# Altium PCB 202014A2232.PcbDoc
Units mil, origin at the board's own origin, x right, y up, seen from the top; angles counter-clockwise.
Board outline 2085 x 1810 mil, 2 copper layers (Top Layer, Bottom Layer); 59 components, 59 nets, 231 pads, 246 vias.
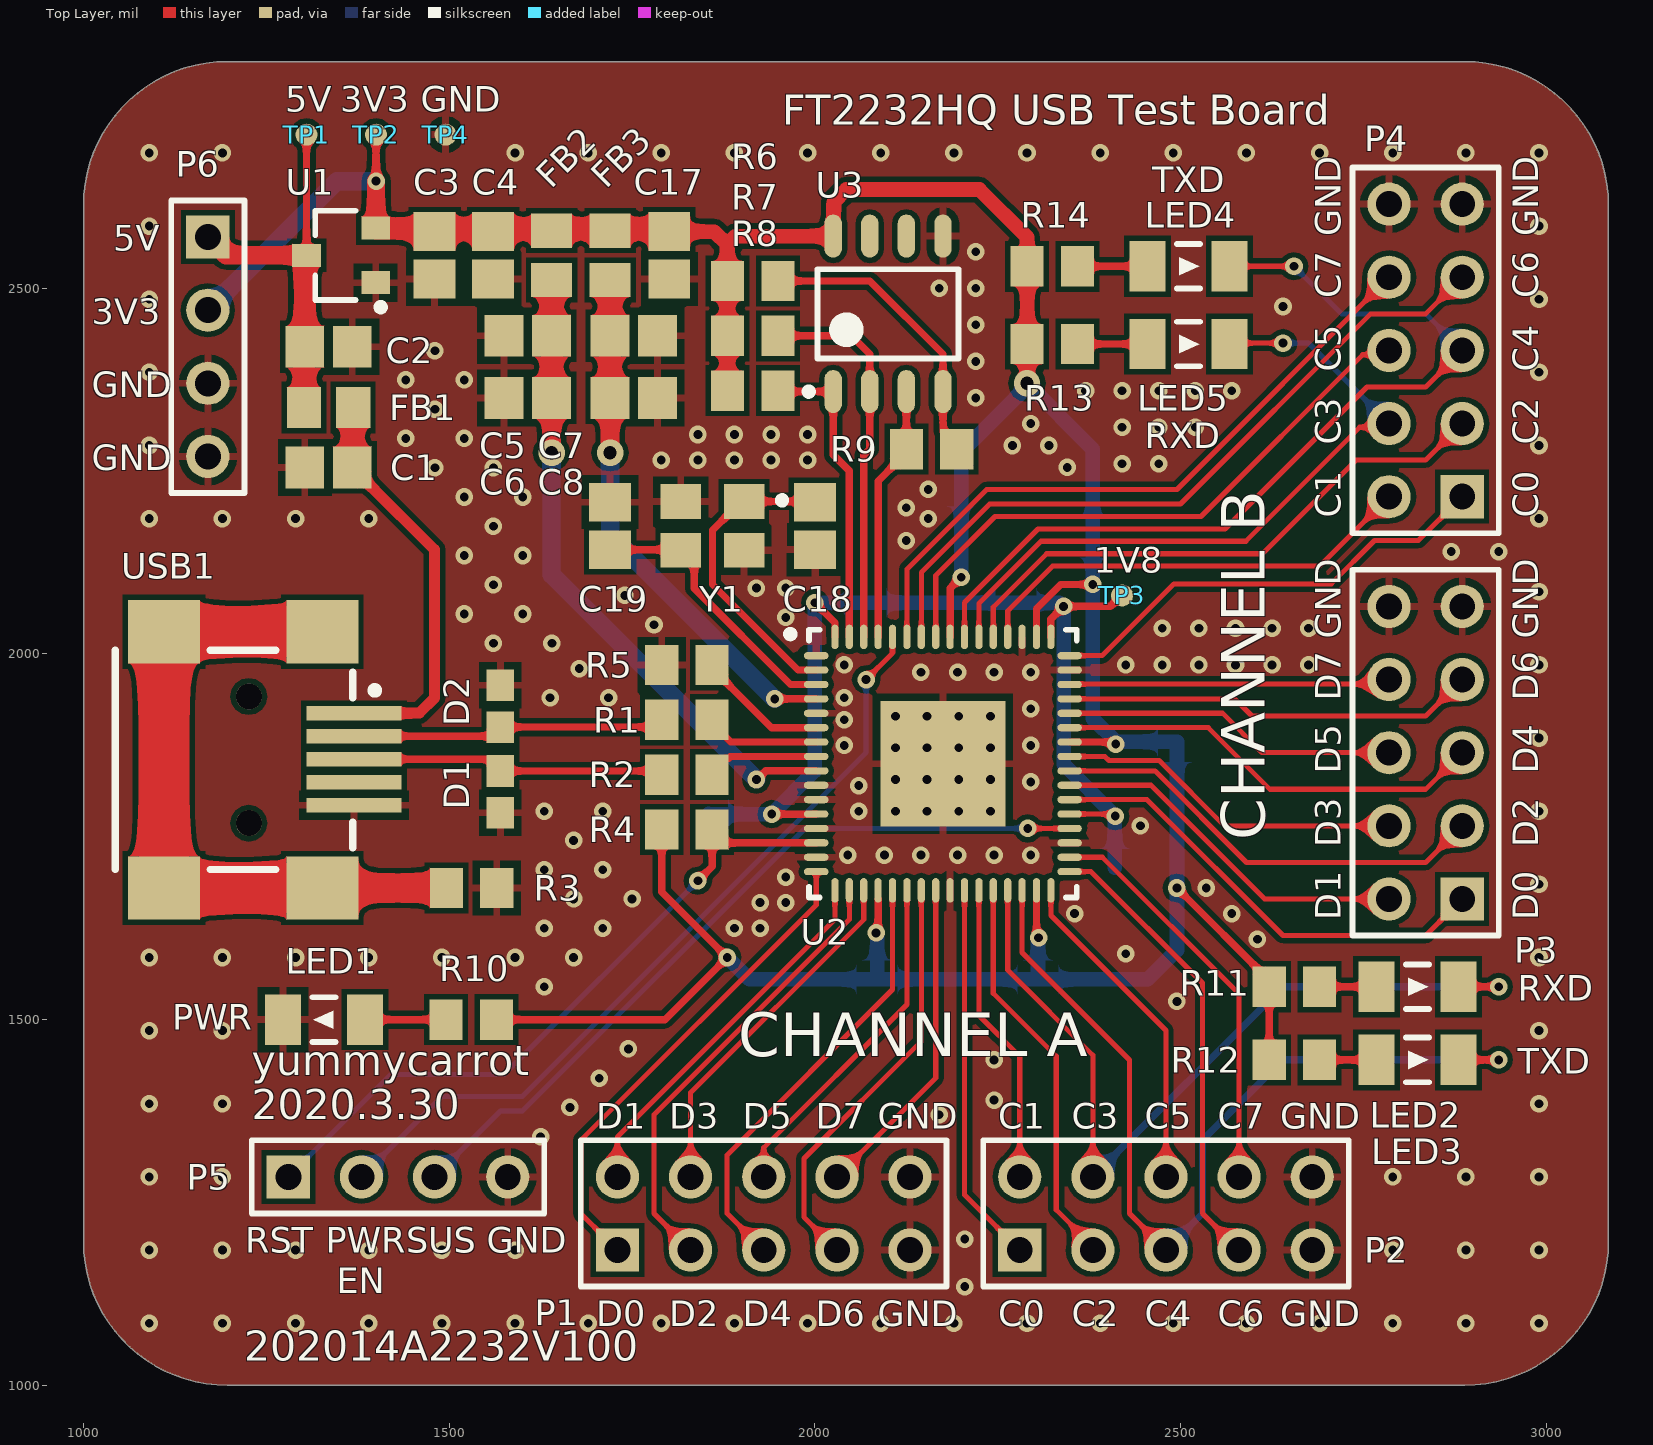
[diagram p0: Top Layer view]
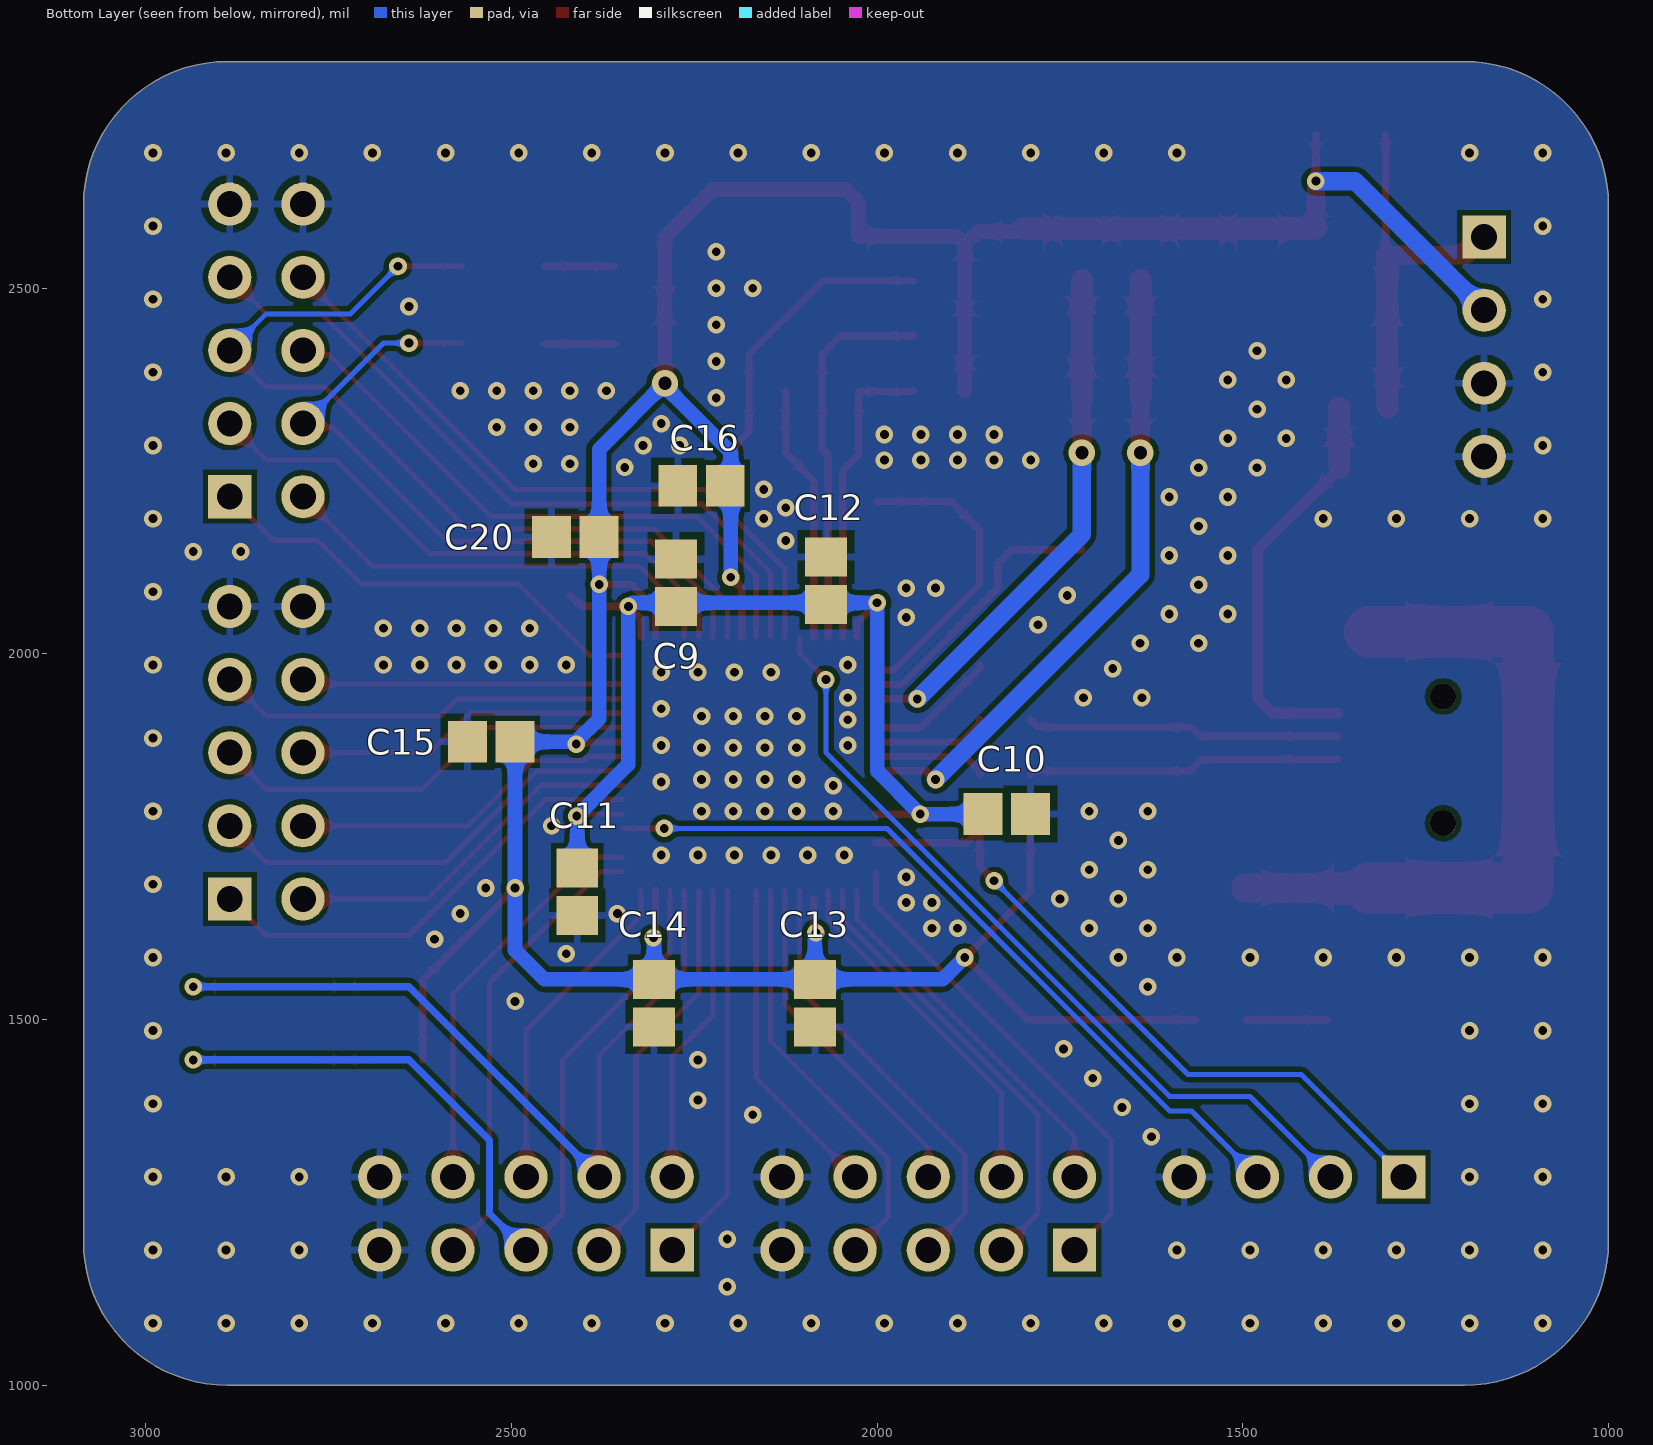
[diagram p1: Bottom Layer view, seen from below]
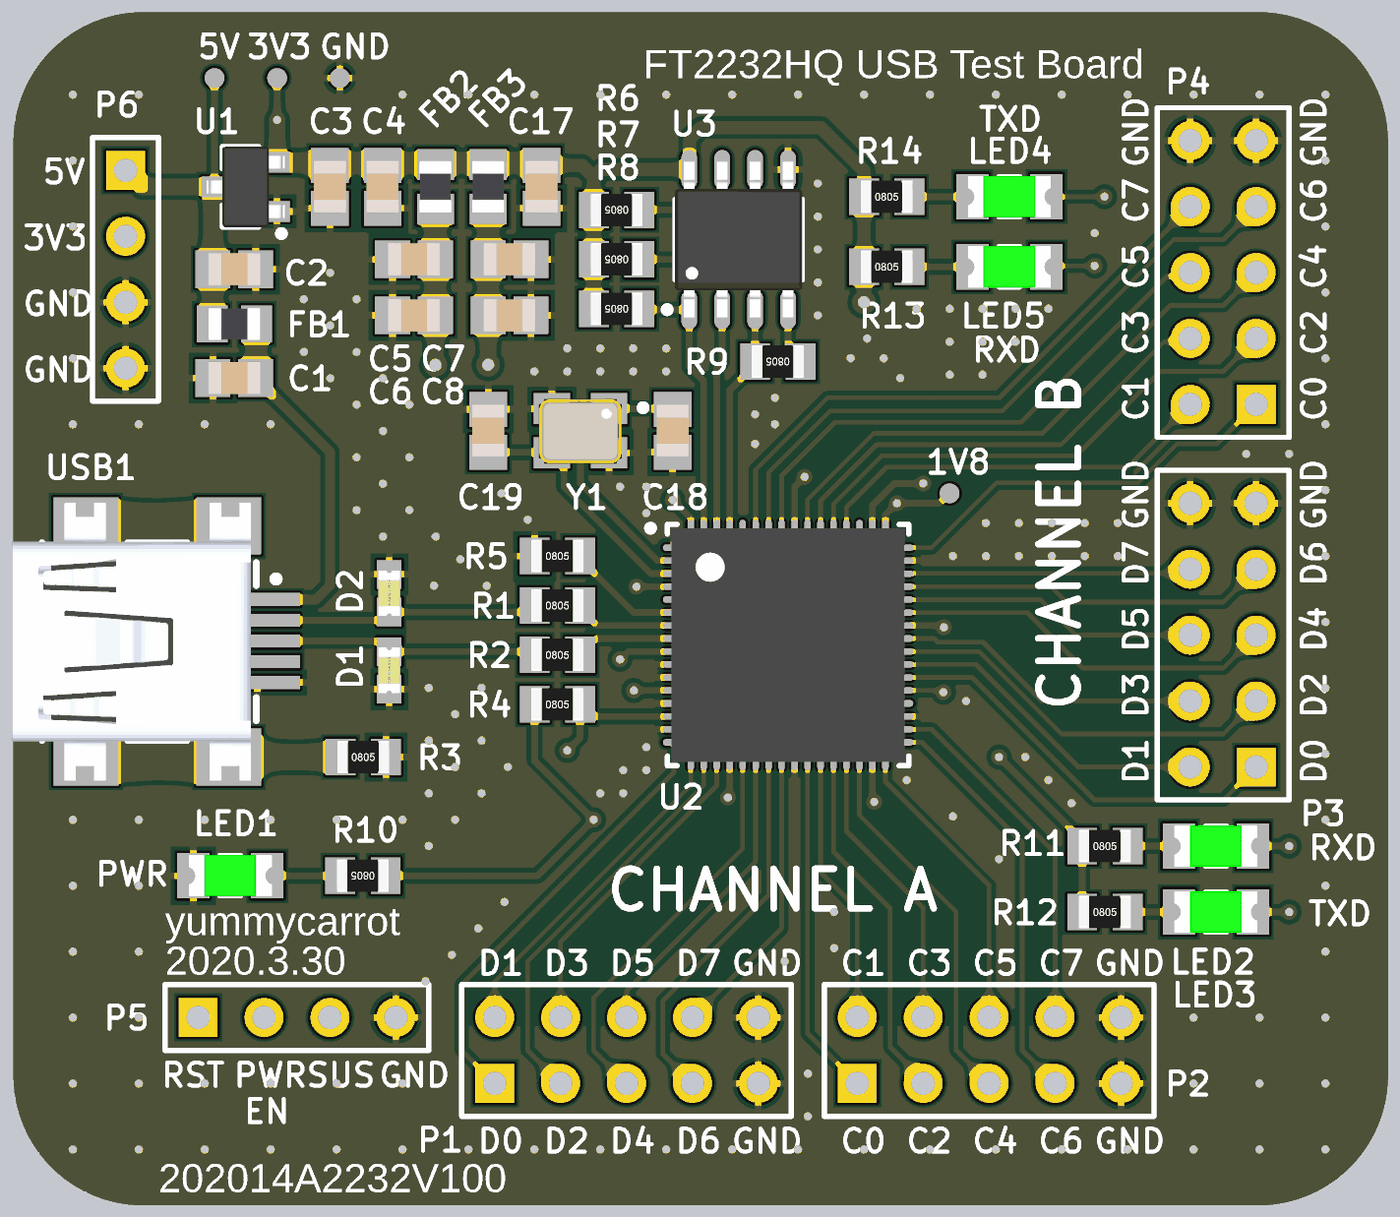
[diagram p2: 3D render of the assembled board from above, using the file's embedded part models]
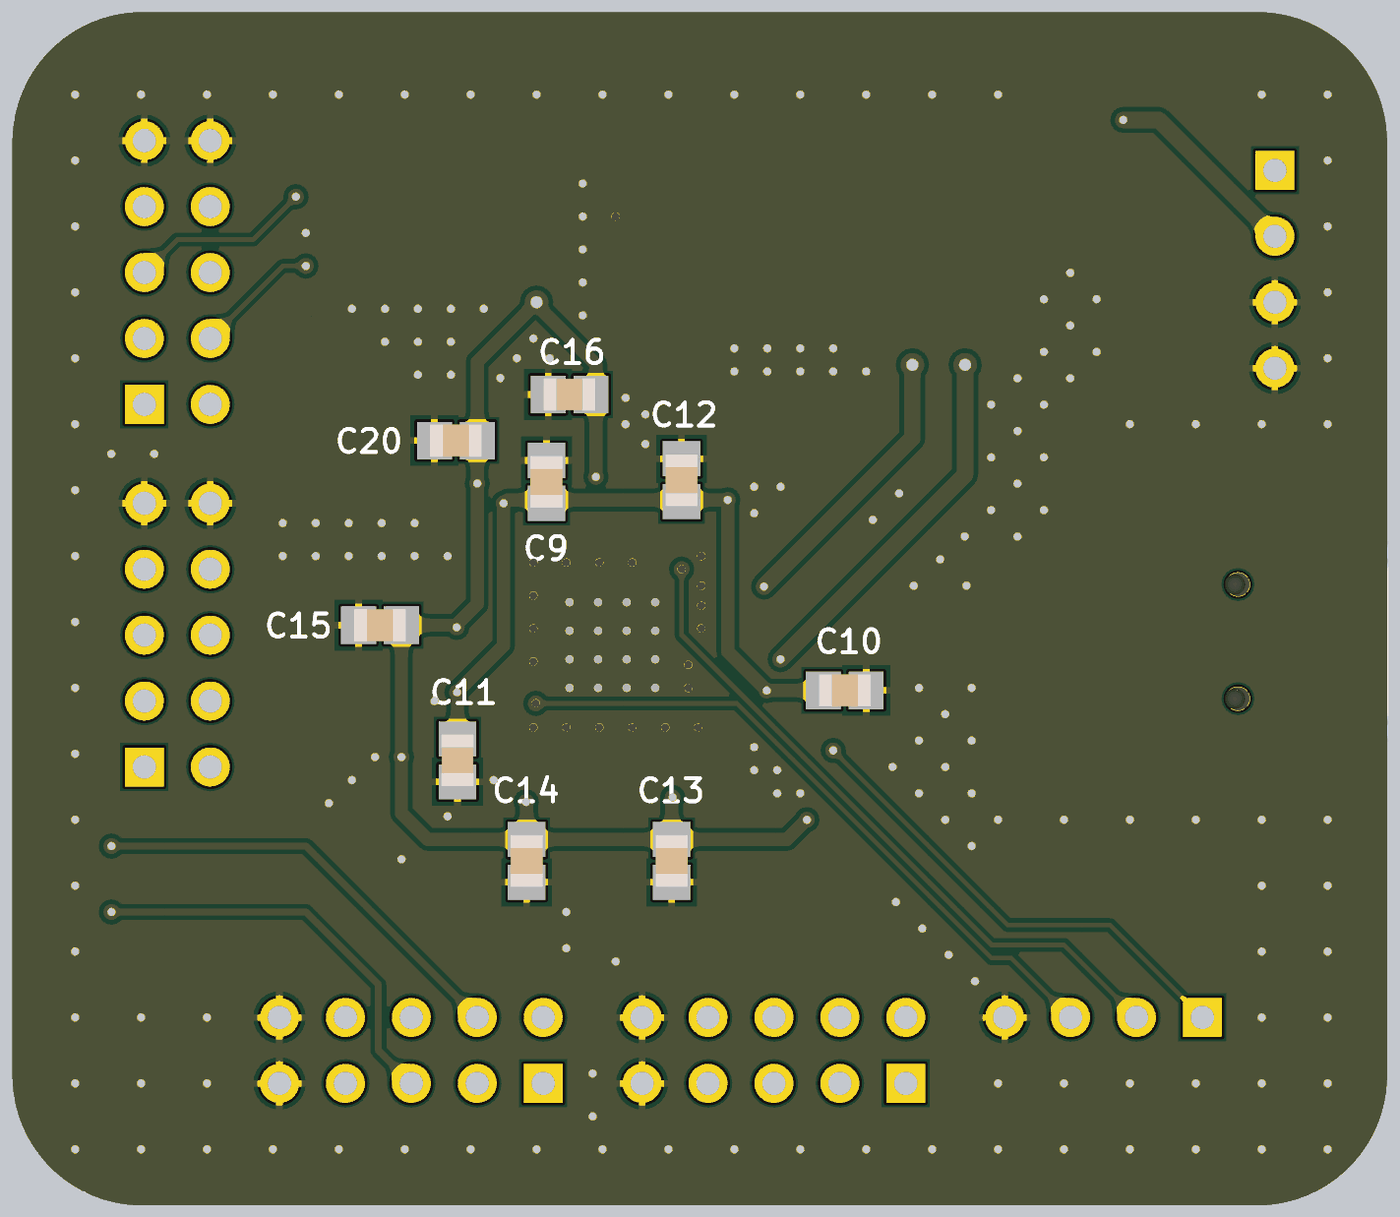
[diagram p3: 3D render of the assembled board from below, using the file's embedded part models]

## Layer stack, top to bottom
Top Solder: solder mask 0.4, Solder Resist, Dk 3.5
Top Layer: signal copper 1.4
Dielectric 1: dielectric 12.6, FR-4, Dk 4.8
Bottom Layer: signal copper 1.4
Bottom Solder: solder mask 0.4, Solder Resist, Dk 3.5

## Board outline
1000,1196.85 ccw(c1196.85,1196.85) 1196.85,1000 2888.15,1000 ccw(c2888.15,1196.85) 3085,1196.85 3085,2613.15 ccw(c2888.15,2613.15) 2888.15,2810 1196.85,2810 ccw(c1196.85,2613.15) 1000,2613.15

## Design rules (kind name [scope] priority, off if disabled: settings)
Clearance [All] p1: gap=7 ignorepadtopadclearanceinfootprint=FALSE
PolygonConnect [All] p1: thpad.connectstyle=Relief thpad.reliefconductorwidth=10 thpad.reliefentries=4 thpad.polygonreliefangle="90 Angle" thpad.airgapwidth=10 smdpad.connectstyle=Relief smdpad.reliefconductorwidth=10 smdpad.reliefentries=4 smdpad.polygonreliefangle="90 Angle" smdpad.airgapwidth=10 via.connectstyle=Direct via.reliefconductorwidth=10 via.reliefentries=4 via.polygonreliefangle="90 Angle" via.airgapwidth=10
RoutingVias [All] p1: holewidth=12 width=24 viastyle="Through Hole" minholewidth=12 minwidth=24 maxholewidth=28 maxwidth=50
SolderMaskExpansion [All] p1: expansion=4 istentingtop=FALSE
Width [All] p1: maxlimit=100 minlimit=7 preferedwidth=10
30 further rules are at their usual default settings.

## Components (designator, comment, footprint, x,y, rotation, side; value= is the part's Value field where it differs from the comment)
C1 "Cap" C0805 1335,2255 r180 top value=10nf
C2 "Cap" C0805 1335,2420 r180 top value=4.7uf
C3 "Cap" C0805 1480,2545 r90 top value=4.7uf
C4 "Cap" C0805 1560,2545 r90 top value=0.1uf
C5 "Cap" C0805 1607.52,2435 r0 top value=4.7uf
C6 "Cap" C0805 1607.52,2350 r0 top value=0.1uf
C7 "Cap" C0805 1752.48,2435 r180 top value=4.7uf
C8 "Cap" C0805 1752.48,2350 r180 top value=0.1uf
C9 "Cap" C0805 2275,2097.48 r270 bottom value=4.7uf
C10 "Cap" C0805 1822.52,1781.1 r180 bottom value=0.1uf
C11 "Cap" C0805 2410,1675 r270 bottom value=0.1uf
C12 "Cap" C0805 2070,2100 r90 bottom value=0.1uf
C13 "Cap" C0805 2085,1522.52 r270 bottom value=0.1uf
C14 "Cap" C0805 2305,1522.52 r270 bottom value=0.1uf
C15 "Cap" C0805 2527.48,1880 r0 bottom value=0.1uf
C16 "Cap" C0805 2240,2230 r0 bottom value=0.1uf
C17 "Cap" C0805 1801,2545 r90 top value=0.1uf
C18 "Cap" C0805 2000,2175 r90 top value=27pf
C19 "Cap" C0805 1720,2175 r270 top value=27pf
C20 "Cap" C0805 2412.48,2160 r0 bottom value=0.1uf
D1 "PGB1010603" PGB1010603-0603 1570,1811.46 r90 top
D2 "PGB1010603" PGB1010603-0603 1570,1928.54 r270 top
FB1 "Ferrite Bead" FB0805 1335,2336.91 r180 top value="600R 1.5A"
FB2 "Ferrite Bead" FB0805 1640,2545 r270 top value="600R 1.5A"
FB3 "Ferrite Bead" FB0805 1720,2545 r270 top value="600R 1.5A"
LED1 "LED" LED1206 1329.96,1405 r180 top
LED2 "LED" LED1206 2822.83,1640 r0 top
LED3 "LED" LED1206 2822.83,1540 r0 top
LED4 "LED" LED1206 2509.65,2518.7 r0 top
LED5 "LED" LED1206 2509.65,2625 r0 top
P1 "Header 5X2" HDR2X5 1730,1185 r0 top
P2 "Header 5X2" HDR2X5 2280,1185 r0 top
P3 "Header 5X2" HDR2X5 2885,1665 r90 top
P4 "Header 5X2" HDR2X5 2885,2215 r90 top
P5 "Header 4" HDR1X4 1280,1285 r0 top
P6 "Header 4" HDR1X4 1170,2570 r270 top
R1 "Res" R0805 1825,1910 r0 top value=10R
R2 "Res" R0805 1825,1835 r0 top value=10R
R3 "Res" R0805 1530.55,1680 r0 top value=0R
R4 "Res" R0805 1825,1760 r0 top value=1K
R5 "Res" R0805 1825,1985 r0 top value=12K
R6 "Res" R0805 1915,2510 r180 top value=10K
R7 "Res" R0805 1915,2435 r180 top value=10K
R8 "Res" R0805 1915,2360 r180 top value=10K
R9 "Res" R0805 2159.45,2280 r180 top value=2K
R10 "Res" R0805 1530,1500 r180 top value=1K
R11 "Res" R0805 2655.55,1545 r0 top value=NC/1K
R12 "Res" R0805 2655.55,1445 r0 top value=NC/1K
R13 "Res" R0805 2324.61,2423.7 r0 top value=NC/1K
R14 "Res" R0805 2324.61,2530 r0 top value=NC/1K
TP1 "TestPoint" TestPoint-R30 1305,2710 r0 top
TP2 "TestPoint" TestPoint-R30 1400,2710 r90 top
TP3 "TestPoint" TestPoint-R30 2420,2080 r90 top
TP4 "TestPoint" TestPoint-R30 1495,2710 r90 top
U1 "XC6206" XC6206-SOT23 1352.24,2545 r180 top
U2 "FT2232HQ" FT2232HQ-QFN64 2175,1850 r0 top
U3 "93LC46" 93LC46-SOIC8 2100,2465 r90 top
USB1 "USB" USB-Mini-SMT 1218.27,1855.2 r90 top
Y1 "XTAL" XTAL-3225 1860,2175 r180 top value=12.000M

## Footprints (in the part's own frame and the unit in brackets; to place one, negate y for a bottom-side part, rotate by r counter-clockwise, add the part's x,y. Pads: shape width x height; smd on the part's side, far side on the other; paste and mask are expansions set on the pad)
93LC46-SOIC8 [mm] "SOIC, 8-Leads, Body 4.90x3.90mm, Pitch 1.27mm, IPC Medium Density"
  oval 1.5x0.6 smd: 1(-2.7,1.905) 2(-2.7,0.635) 3(-2.7,-0.635) 4(-2.7,-1.905) 5(2.7,-1.905) 6(2.7,-0.635) 7(2.7,0.635) 8(2.7,1.905)
  silkscreen extent -2.82,-2.45 1.55,2.88, body extent -3,-2.45 3,2.45, height 1.75
C0805 [mm] "Chip Capacitor, 2-Leads, Body 2.01x1.25mm, IPC Medium Density"
  rect 1.35x1.45 smd: 1(-0.825,0) 2(0.825,0)
  body extent -1,-0.62 1,0.63, height 0.58
FB0805 [mm] "Chip Inductor, 2-Leads, Body 2.00x1.20mm, IPC Medium Density"
  rect 1.19x1.42 smd: 1(-0.855,0) 2(0.855,0)
  body extent -1,-0.62 1,0.63, height 0.85
FT2232HQ-QFN64 [mm] "QFN, 64-Leads, Body 9.00x9.00mm, Pitch 0.50mm, Thermal Pad 4.35x4.35mm, IPC Medium Density"
  oval 0.85x0.25 smd: 1(-4.4,3.75) 2(-4.4,3.25) 3(-4.4,2.75) 4(-4.4,2.25) 5(-4.4,1.75) 6(-4.4,1.25) 7(-4.4,0.75) 8(-4.4,0.25) 9(-4.4,-0.25) 10(-4.4,-0.75) 11(-4.4,-1.25) 12(-4.4,-1.75) 13(-4.4,-2.25) 14(-4.4,-2.75) 15(-4.4,-3.25) 16(-4.4,-3.75) 33(4.4,-3.75) 34(4.4,-3.25) 35(4.4,-2.75) 36(4.4,-2.25) 37(4.4,-1.75) 38(4.4,-1.25) 39(4.4,-0.75) 40(4.4,-0.25) 41(4.4,0.25) 42(4.4,0.75) 43(4.4,1.25) 44(4.4,1.75) 45(4.4,2.25) 46(4.4,2.75) 47(4.4,3.25) 48(4.4,3.75)
  oval 0.25x0.85 smd: 17(-3.75,-4.4) 18(-3.25,-4.4) 19(-2.75,-4.4) 20(-2.25,-4.4) 21(-1.75,-4.4) 22(-1.25,-4.4) 23(-0.75,-4.4) 24(-0.25,-4.4) 25(0.25,-4.4) 26(0.75,-4.4) 27(1.25,-4.4) 28(1.75,-4.4) 29(2.25,-4.4) 30(2.75,-4.4) 31(3.25,-4.4) 32(3.75,-4.4) 49(3.75,4.4) 50(3.25,4.4) 51(2.75,4.4) 52(2.25,4.4) 53(1.75,4.4) 54(1.25,4.4) 55(0.75,4.4) 56(0.25,4.4) 57(-0.25,4.4) 58(-0.75,4.4) 59(-1.25,4.4) 60(-1.75,4.4) 61(-2.25,4.4) 62(-2.75,4.4) 63(-3.25,4.4) 64(-3.75,4.4)
  rect 4.35x4.35 smd: 65(0,0)
  silkscreen extent -5.42,-4.65 4.65,4.65, body extent -4.5,-4.5 4.5,4.5, height 0.9
HDR1X4 [mm] "Connector; Header; 4 Position"
  rect 1.5x1.5 hole 0.9: 1(0,0)
  round 1.5 hole 0.9: 2(2.54,0) 3(5.08,0) 4(7.62,0)
  silkscreen extent -1.27,-1.27 8.89,1.27
HDR2X5 [mm] "Connector; Header; 5x2 Position"
  rect 1.5x1.5 hole 0.9: 1(0,0)
  round 1.5 hole 0.9: 2(0,2.54) 3(2.54,0) 4(2.54,2.54) 5(5.08,0) 6(5.08,2.54) 7(7.62,0) 8(7.62,2.54) 9(10.16,0) 10(10.16,2.54)
  silkscreen extent -1.27,-1.27 11.43,3.81
LED1206 [mm] "Chip LED, 2-Leads, Body 3.20x1.60mm, IPC Medium Density"
  rect 1.25x1.75 smd: 1(-1.398,-2.413) 2(1.452,-2.413)
  silkscreen extent -0.37,-3.19 0.43,-1.64, body extent -1.57,-3.21 1.63,-1.61, height 1.1
PGB1010603-0603 [mm] "Chip Diode, 2-Leads, Body 1.66x0.84mm, IPC Medium Density"
  rect 1.1x0.95 smd: 1(-0.725,0) 2(0.725,0)
  body extent -0.88,-0.42 0.88,0.42, height 0.35
R0805 [mm] "Chip Resistor, 2-Leads, Body 2.00x1.25mm, IPC Medium Density"
  rect 1.15x1.4 smd: 1(-0.875,0) 2(0.875,0)
  body extent -1,-0.62 1,0.63, height 0.59
TestPoint-R30 [mil]
  round 30 smd: 1(0,0)
USB-Mini-SMT [mm]
  round 0.9 hole 0.9: 0(-2.2,-0.2) 0(2.2,-0.2)
  rect 0.5x3.3 smd: 1(1.623,-3.85) 2(0.823,-3.85) 3(0.023,-3.85) 4(-0.777,-3.85) 5(-1.577,-3.85)
  rect 2.2x2.5 smd: 6(4.45,-2.75) 7(-4.45,-2.75) 8(-4.45,2.75) 9(4.45,2.75)
  silkscreen extent -3.81,-4.7 3.81,4.44, body extent -5.35,-3.61 5.35,5.59, height 3.95
XC6206-SOT23 [mm] "SOT23, 3-Leads, Body 2.90x2.80mm, Pitch 0.95mm, IPC Medium Density"
  rect 1x0.8 smd: 1(-1.2,0.95) 2(-1.2,-0.95) 3(1.2,0)
  silkscreen extent -1.5,-1.55 0.9,1.92, body extent -1.5,-1.55 1.5,1.55, height 1.3
XTAL-3225 [mm] "4脚3225贴片晶振"
  rect 1.4x1.2 smd: 1(-1.1,-0.85) 2(1.1,-0.85) 3(1.1,0.85) 4(-1.1,0.85)
  silkscreen extent -2.54,-1.01 -2.29,-0.76, body extent -1.6,-1.23 1.6,1.27, height 0.61

## Part data
D1 D2: "Surface Mount Polymeric Electrostatic Discharge Suppressors"
P1 P2 P3 P4: "Header, 5-Pin, Dual row", LatestRevisionDate=17-Jul-2002, LatestRevisionNote="Re-released for DXP Platform.", Publisher="Altium Limited"
P5 P6: "Header, 4-Pin", LatestRevisionDate=17-Jul-2002, LatestRevisionNote="Re-released for DXP Platform.", Publisher="Altium Limited"
R1 R2 R3 R4 R5 R6 R7 R8 R9 R10 R11 R12 R13 R14: "电阻"
TP1 TP2 TP3 TP4: "测试点"
U1: "Low ESR Cap. Compatible Positive Voltage Regulators"
U2: "Dual High Speed USB to Multipurpose UART/FIFO IC"
U3: "1K Microwire Compatible Serial EEPROM"
USB1: library part USB-SHIELD
Y1: library part XTAL3, "无源晶振"

## Via types
v1: diameter 24, hole 12, Top Layer to Bottom Layer, tented both sides, 243 vias
v2: diameter 36, hole 18, Top Layer to Bottom Layer, tented both sides, 3 vias

## Nets (pads, with @x,y where several pads share a name; then routed paths per layer and width w, separated by ;. In a path a pad name is that pad's centre, name@x,y a point inside that pad or via, vN(x,y) a via of type N, cw(c..) or ccw(c..) an arc to the next point about the centre after c; other vN are vias at no path point)
+3V3: C3.2 C4.2 C13.1 C14.1 C15.1 C16.1 C17.2 C20.1 FB2.1 FB3.1 P6.2 R4.1 R6.2 R7.2 R8.2 R10.1 R11.1 R12.1 R13.1 R14.1 TP2.1 U1.2 U2.20 U2.31 U2.42 U2.50 U2.56 U3.8 | length 5037
  Top Layer w10: U1.2 U1.2@1400,2582.91 ; v1(1400,2646.46) TP2.1 ; R10.1 1795,1500 v1(1880,1585) 1790.55,1674.45 R4.1 ; v1(2083.6,1618.66) 2083.6,1622.45 2086.42,1625.26 U2.20@2086.42,1665.04 ; U2.56 2184.92,2023.31 2184.92,2089.92 v1(2200,2105) ; U2.31 2302.95,1618.57 2305.77,1615.76 v1(2305.77,1611.97) ; U2.50 2302.95,2061.89 2336.06,2095 v1(2380,2095) ; U2.42 2348.31,1879.61 2408.28,1879.61 v1(2411.17,1876.71) ; v1(2495,1680) 2621.1,1553.9 R11.1 R12.1
  Top Layer w20: C17.2 1862.52,2577.48 1880,2560 ; R8.2 1880,2360.55 1880,2560 ; v2(2290,2370) 2290.16,2370.16 R13.1 R14.1 2290.16,2569.84 2225,2635 2042.91,2635 2025.69,2617.78 2025.69,2571.99 U3.8 1891.3,2571.3 1880,2560
  Top Layer w25: U1.2@1400,2582.91 v1(1400,2646.46)
  Top Layer w30: U1.2 1400.24,2581.65 C17.2@1801,2581.65
  Bottom Layer w20: v1(1880,1585) 1910,1555 C13.1 ; v1(2083.6,1618.66) 2083.6,1617.58 2085,1616.18 C13.1 ; v1(2200,2105) 2200,2275.67 2290,2365.67 v2(2290,2370) 2380,2280 C20.1 v1(2380,2095) 2380,1911.72 v1@2411.17,1880.55 ; v1(2305.77,1611.97) 2305.77,1610.89 2305,1610.12 C14.1 ; v1(2411.17,1876.71) 2412.25,1876.71 2415.54,1880 C15.1 v1(2495,1680) 2495,1595 2455,1555 C14.1 ; C13.1 C14.1
  Bottom Layer w25: P6.2 1346.46,2646.46 v1(1400,2646.46)
+5V: C2.2 FB1.2 P6.1 TP1.1 U1.3 | length 519.2
  Top Layer w10: U1.3 TP1.1
  Top Layer w25: P6.1 1195,2545 1303.27,2545 U1.3
  Top Layer w30: FB1.2 1301.93,2337.5 1301.93,2419.41 C2.2 1302.52,2544.25 U1.3@1303.27,2545
AC0: P2.1 U2.26 | length 523
  Top Layer w7: U2.26 2204.53,1260.47 P2.1
AC1: P2.2 U2.27 | length 414.9
  Top Layer w7: U2.27 2224.21,1505.79 2280,1450 P2.2
AC2: P2.3 U2.28 | length 548.1
  Top Layer w7: U2.28 2243.9,1536.1 2330,1450 2330,1240 2380,1190 P2.3
AC3: LED2.2 P2.4 U2.29 | length 1157.7
  Top Layer w7: U2.29 2263.58,1567.87 2380,1451.46 P2.4
  Top Layer w10: LED2.2 v1(2935,1545)
  Bottom Layer w10: P2.4 2640,1545 v1(2935,1545)
AC4: LED3.2 P2.5 U2.30 | length 1249.5
  Top Layer w7: U2.30 2283.27,1591.73 2430,1445 2430,1235 P2.5
  Top Layer w10: LED3.2 v1(2935,1445)
  Bottom Layer w10: P2.5 2530,1235 2530,1335 2640,1445 v1(2935,1445)
AC5: P2.6 U2.32 | length 457
  Top Layer w7: U2.32 2322.64,1642.36 2480,1485 P2.6
AC6: P2.7 U2.33 | length 630.6
  Top Layer w7: U2.33 2377.64,1702.36 2530,1550 2530,1235 P2.7
AC7: P2.8 U2.34 | length 559.2
  Top Layer w7: U2.34 2392.95,1722.05 2580,1535 P2.8
AD0: P1.1 U2.16 | length 671.4
  Top Layer w7: P1.1 1680,1235 1680,1335 2001.77,1656.77 U2.16
AD1: P1.2 U2.17 | length 514.9
  Top Layer w7: P1.2 1730,1339.8 2027.36,1637.16 U2.17
AD2: P1.3 U2.18 | length 623.1
  Top Layer w7: P1.3 1780,1235 1780,1370 2047.05,1637.05 U2.18
AD3: P1.4 U2.19 | length 489.8
  Top Layer w7: P1.4 1830,1400 2066.73,1636.73 U2.19
AD4: P1.5 U2.21 | length 606.1
  Top Layer w7: P1.5 1880,1235 1880,1315 2106.1,1541.1 U2.21
AD5: P1.6 U2.22 | length 472.9
  Top Layer w7: P1.6 1930,1325 2125.79,1520.79 U2.22
AD6: P1.7 U2.23 | length 576.9
  Top Layer w7: P1.7 1985,1230 1985,1310 2145.47,1470.47 U2.23
AD7: P1.8 U2.24 | length 447.8
  Top Layer w7: P1.8 2165.16,1420.16 U2.24
BC0: P4.1 U2.48 | length 626.8
  Top Layer w7: U2.48 2392.64,1997.64 2490.88,2095.88 2705.88,2095.88 2765,2155 2825,2155 P4.1
BC1: P4.2 U2.52 | length 621.6
  Top Layer w7: U2.52 2263.58,2058.58 2325,2120 2690,2120 P4.2
BC2: P4.3 U2.53 | length 785.8
  Top Layer w7: U2.53 2243.9,2063.9 2317,2137 2612,2137 2740,2265 2835,2265 P4.3
BC3: LED4.2 P4.4 U2.54 | length 972.9
  Top Layer w7: U2.54 2224.21,2069.21 2309,2154 2589,2154 2744.97,2309.97 2779.97,2309.97 P4.4 ; LED4.2 2568.11,2425 v1(2640,2425)
  Bottom Layer w7: v1(2640,2425) 2675,2425 P4.4
BC4: LED5.2 P4.5 U2.55 | length 1236.3
  Top Layer w7: U2.55 2204.53,2070.51 2305.02,2171 2560.8,2171 2754.8,2365 2835,2365 P4.5 ; LED5.2 v1(2655,2530)
  Bottom Layer w7: v1(2655,2530) 2720,2465 2835,2465 P4.5
BC5: P4.6 U2.57 | length 831.2
  Top Layer w7: U2.57 2165.16,2107.07 2246.08,2188 2528,2188 2749.07,2409.07 2779.07,2409.07 P4.6
BC6: P4.7 U2.58 | length 994.9
  Top Layer w7: U2.58 2145.47,2111.43 2239.04,2205 2500,2205 2760,2465 2835,2465 P4.7
BC7: P4.8 U2.59 | length 917.1
  Top Layer w7: U2.59 2125.79,2115.79 2235,2225 2495,2225 P4.8
BD0: P3.1 U2.38 | length 634.4
  Top Layer w7: U2.38 2454.21,1800.79 2640,1615 2835,1615 P3.1
BD1: P3.2 U2.39 | length 501.2
  Top Layer w7: U2.39 2459.53,1820.47 2615,1665 P3.2
BD2: P3.3 U2.40 | length 609.3
  Top Layer w7: U2.40 2464.84,1840.16 2590,1715 2835,1715 P3.3
BD3: P3.4 U2.41 | length 476.1
  Top Layer w7: U2.41 2396.22,1859.84 2401.91,1854.16 2470.64,1854.16 2559.8,1765 P3.4
BD4: P3.5 U2.43 | length 592.4
  Top Layer w7: U2.43 2537.8,1899.21 2622.01,1815 2835,1815 P3.5
BD5: P3.6 U2.44 | length 459.1
  Top Layer w7: U2.44 2557.48,1918.9 2611.38,1865 P3.6
BD6: P3.7 U2.45 | length 567.3
  Top Layer w7: U2.45 2573.89,1938.58 2597.47,1915 2835,1915 P3.7
BD7: P3.8 U2.46 | length 439.6
  Top Layer w7: U2.46 2348.77,1958.81 2778.81,1958.81 P3.8
GND: C1.2 C2.1 C3.1 C4.1 C5.1 C6.1 C7.1 C8.1 C9.1 C10.2 C11.2 C12.2 C13.2 C14.2 C15.2 C16.2 C17.1 C18.1 C19.1 C20.2 D1.1 D2.1 LED1.2 P1.9 P1.10 P2.9 P2.10 P3.9 P3.10 P4.9 P4.10 P5.4 P6.3 P6.4 R3.2 R5.1 TP4.1 U1.1 U2.1 U2.5 U2.10 U2.11 U2.13 U2.15 U2.25 U2.35 U2.47 U2.51 U2.65 U3.5 USB1.5 Y1.2 Y1.4
  other v1: 1090,1085 1190,1085 1290,1085 1390,1085 1490,1085 1590,1085 1690,1085 1790,1085 1890,1085 1990,1085 2090,1085 2190,1085 2290,1085 2390,1085 2490,1085 2590,1085 2690,1085 2790,1085 2890,1085 2990,1085 2205,1135 1090,1185 1190,1185 1290,1185 1390,1185 1490,1185 1590,1185 2790,1185 2890,1185 2990,1185 2205,1200 1090,1285 1190,1285 2790,1285 2890,1285 2990,1285 1625,1340 2170,1370 1665,1380 1090,1385 1190,1385 2990,1385 2245,1390 1705,1420 2245,1445 1745,1460 1090,1485 1190,1485 2990,1485 2495,1525 1630,1545 1090,1585 1190,1585 1290,1585 1390,1585 1490,1585 1590,1585 1670,1585 2990,1585 2425,1590 2605,1610 1630,1625 1710,1625 1890,1625 1925,1625 2355,1645 2570,1645 1925,1660 1960,1660 1670,1665 1750,1665 2535,1680 2990,1685 1960,1695 1630,1705 1710,1705 2045,1725 2095,1725 2145,1725 2195,1725 2245,1725 2295,1725 1670,1745 2445,1765 1630,1785 1710,1785 2060,1785 2110.04,1785.04 2153.35,1785.04 2196.65,1785.04 2239.96,1785.04 2990,1785 2060,1820 2295,1825 2110.04,1828.35 2153.35,1828.35 2196.65,1828.35 2239.96,1828.35 2110.04,1871.65 2153.35,1871.65 2196.65,1871.65 2239.96,1871.65 2040,1875 2295,1875 2990,1885 2040,1910 2110.04,1914.96 2153.35,1914.96 2196.65,1914.96 2239.96,1914.96 2295,1925 1637.91,1940 1717.91,1940 2040,1940 2145,1975 2195,1975 2245,1975 2295,1975 1677.91,1980 2040,1985 2425,1985 2475,1985 2525,1985 2575,1985 2625,1985 2675,1985 2990,1985 1560.48,2014.6 1640.48,2014.6 2475,2035 2525,2035 2575,2035 2625,2035 2675,2035 1780,2040 1960,2050 1520.48,2054.6 1600.48,2054.6 1740,2080 2990,2085 1920,2090 1960,2090 1560.48,2094.6 1520.48,2134.6 1600.48,2134.6 2870,2140 2935,2140 2125,2155 1560.48,2174.6 1090,2185 1190,2185 1290,2185 1390,2185 2155,2185 2990,2185 2125,2200 1520.48,2214.6 1600.48,2214.6 2155,2225 1480.48,2254.6 1560.48,2254.6 2345,2255 2420,2260 2470,2260 1790,2265 1840,2265 1890,2265 1940,2265 1990,2265 1090,2285 2270,2285 2320,2285 2990,2285 1440.48,2294.6 1520.48,2294.6 1840,2300 1890,2300 1940,2300 1990,2300 2420,2310 2470,2310 2520,2310 2295,2315 1480.48,2334.6 2220,2350 2370,2360 2420,2360 2470,2360 2520,2360 2570,2360 1440.48,2374.6 1520.48,2374.6 1090,2385 2990,2385 2220,2400 1480.48,2414.6 2220,2450 2640,2475 1090,2485 2990,2485 2170,2500 2220,2500 2220,2550 1090,2585 2990,2585 1090,2685 1190,2685 1590,2685 1690,2685 1790,2685 1890,2685 1990,2685 2090,2685 2190,2685 2290,2685 2390,2685 2490,2685 2590,2685 2690,2685 2790,2685 2890,2685 2990,2685
NetC1_1: C1.1 FB1.1 USB1.1 | length 564
  Top Layer w15: C1.1 1367.48,2253.03 1386.56,2233.96 1388.52,2233.96 1480,2142.48 1480,1940 1459.09,1919.09 USB1.1
  Top Layer w30: C1.1 1368.07,2255.59 1368.07,2336.32 FB1.1
NetC5_2: C5.2 C6.2 FB2.2 U2.9 | length 885.6
  Top Layer w10: v1(1920,1828.35) 1921.05,1828.35 1932.86,1840.16 U2.9
  Top Layer w25: v2(1640,2275) C6.2
  Top Layer w30: C6.2 C5.2 FB2.2
  Bottom Layer w25: v2(1640,2275) 1640,2108.35 v1(1920,1828.35)
NetC7_2: C7.2 C8.2 FB3.2 U2.4 | length 722.7
  Top Layer w10: v1(1945,1938.58) U2.4
  Top Layer w25: v2(1720,2275) C8.2
  Top Layer w30: C8.2 C7.2 FB3.2
  Bottom Layer w25: v2(1720,2275) 1720,2163.58 v1(1945,1938.58)
NetC18_2: C18.2 U2.2 Y1.1 | length 421.1
  Top Layer w10: C18.2 1999.02,2208.46 Y1.1 1899.37,2208.46 1860,2169.09 1860,2095 1976.97,1978.03 2001.69,1978.03 U2.2
NetC19_2: C19.2 U2.3 Y1.3 | length 377.6
  Top Layer w10: C19.2 1815.73,2142.5 1835,2123.23 1835,2090 1966.65,1958.35 2001.69,1958.35 U2.3
NetD1_2: D1.2 R2.1 USB1.3 | length 430.9
  Top Layer w10: USB1.3 1556.3,1856.1 1570,1842.4 D1.2 1785.55,1840 R2.1
NetD2_2: D2.2 R1.1 USB1.2 | length 430
  Top Layer w10: USB1.2 1557.6,1887.6 D2.2 1780.55,1900 R1.1
NetLED1_1: LED1.1 R10.2 | length 110.6
  Top Layer w10: LED1.1 R10.2
NetLED2_1: LED2.1 R11.2 | length 77.8
  Top Layer w10: R11.2 LED2.1
NetLED3_1: LED3.1 R12.2 | length 77.8
  Top Layer w10: R12.2 LED3.1
NetLED4_1: LED4.1 R13.2 | length 95.6
  Top Layer w10: R13.2 LED4.1
NetLED5_1: LED5.1 R14.2 | length 95.6
  Top Layer w10: R14.2 LED5.1
NetR1_2: R1.2 U2.7 | length 157.8
  Top Layer w10: R1.2 1859.45,1905.08 1877.09,1887.44 1885,1879.53 U2.7
NetR2_2: R2.2 U2.8 | length 155.5
  Top Layer w10: R2.2 1859.45,1839.92 1877.09,1857.56 1882.01,1857.56 1884.29,1859.84 U2.8
NetR3_1: R3.1 USB1.6 USB1.7 USB1.8 USB1.9 | length 953
  Top Layer w40: USB1.7 R3.1
  Top Layer w70: USB1.7 USB1.8 USB1.9 USB1.6
NetR5_2: R5.2 U2.6 | length 180.7
  Top Layer w10: R5.2 1859.45,1980.08 1877.09,1962.44 1877.56,1962.44 1940.71,1899.29 2001.69,1899.29 U2.6
NetR6_1: R6.1 R9.1 U3.4 | length 404.8
  Top Layer w10: R6.1 2075,2510 2175,2410 2175,2303.82 2193.9,2284.92 R9.1
NetR7_1: R7.1 U2.62 U3.2 | length 526.1
  Top Layer w10: R7.1 2050,2435 2075,2410 U3.2 2075,2280 2066.73,2271.73 U2.62
NetR8_1: R8.1 U2.63 U3.1 | length 420.7
  Top Layer w10: R8.1 1950.75,2358.7 U3.1 2025,2272.35 2046.97,2250.38 2046.97,2023.31 U2.63
NetR9_2: R9.2 U2.61 U3.3 | length 351.5
  Top Layer w10: U2.61 2086.42,2236.5 2125,2275.08 R9.2 U3.3
nPWREN: P5.2 U2.60 | length 1103.4
  Top Layer w7: v1(2070,1965) 2106.1,2001.1 U2.60
  Bottom Layer w7: P5.2 1490,1395 1600,1395 2070,1865 v1(2070,1965)
nRST: P5.1 R4.2 U2.14 | length 955.4
  Top Layer w10: v1(1840,1690) 1859.45,1709.45 R4.2@1859.45,1759.37 ; R4.2 R4.2@1859.45,1759.37 ; U2.14 1877.09,1741.73 R4.2@1859.45,1759.37
  Bottom Layer w7: P5.1 1420,1425 1575,1425 v1(1840,1690)
nSUSPEND: P5.3 U2.36 | length 1065.6
  Top Layer w7: v1(2291.12,1761.42) U2.36
  Bottom Layer w7: P5.3 1570,1375 1600,1375 1986.42,1761.42 v1(2291.12,1761.42)
VCORE: C9.2 C10.1 C11.1 C12.1 TP3.1 U2.12 U2.37 U2.49 U2.64 | length 1449
  Top Layer w7: U2.37 2407.81,1781.1 v1(2410.62,1778.29)
  Top Layer w10: v1(1941.02,1781.02) 2001.69,1781.02 U2.12 ; v1(2000,2070) 2027.36,2042.64 U2.64 ; U2.49 2322.64,2047.64 v1(2340,2065) 2404.14,2065 2419.14,2080 TP3.1
  Bottom Layer w20: C10.1 1856.1,1780 1857.13,1781.02 v1(1941.02,1781.02) 2000,1840 v1(2000,2070) 2070,2070 2275,2070 2333.92,2070 2338.92,2065 v1(2340,2065) 2340,1848.91 v1(2410.62,1778.29) ; C11.1 v1@2410,1780.48
pads on no net: U3.6 U3.7 USB1.0 USB1.4

## Polygon pours and split planes (outlines as drawn)
GND on Top Layer "GND_L01_P000" (solid, remove dead copper, pour order 0): 1000,1196.85 1000,2613.15 cw(c1196.85,2613.15) 1196.85,2810 2888.15,2810 cw(c2888.15,2613.15) 3085,2613.15 3085,1196.85 cw(c2888.15,1196.85) 2888.15,1000 1196.85,1000 cw(c1196.85,1196.85)
GND on Bottom Layer "GND_L02_P001" (solid, remove dead copper, pour order 1): 1000,1196.85 1000,2613.15 cw(c1196.85,2613.15) 1196.85,2810 2888.15,2810 cw(c2888.15,2613.15) 3085,2613.15 3085,1196.85 cw(c2888.15,1196.85) 2888.15,1000 1196.85,1000 cw(c1196.85,1196.85)

## Silkscreen, mask and mechanical layers (free items; w line width, h text height)
Top Overlay:
  text "5V" at 1276,2741 h35
  text "3V3" at 1351,2741 h35
  text "GND" at 1461,2741 h35
  text "FT2232HQ USB Test Board" at 1955,2710 h70
  text "TXD" at 2461,2631 h35
  text "GND" at 2719,2571 h35 r90
  text "GND" at 2989,2571 h35 r90
  text "5V" at 1041,2551 h35
  text "C7" at 2719,2486 h35 r90
  text "C6" at 2989,2486 h35 r90
  text "3V3" at 1011,2451 h35
  text "C5" at 2719,2386 h35 r90
  text "C4" at 2989,2386 h35 r90
  text "GND" at 1011,2351 h35
  text "C3" at 2719,2286 h35 r90
  text "C2" at 2989,2286 h35 r90
  text "RXD" at 2451,2281 h35
  text "GND" at 1011,2251 h35
  text "C1" at 2719,2186 h35 r90
  text "C0" at 2989,2186 h35 r90
  text "1V8" at 2381,2111 h35
  text "GND" at 2719,2021 h35 r90
  text "GND" at 2989,2021 h35 r90
  text "D7" at 2719,1936 h35 r90
  text "D6" at 2989,1936 h35 r90
  text "D5" at 2719,1836 h35 r90
  text "D4" at 2989,1836 h35 r90
  text "CHANNEL B" at 2615,1745 h60 r90
  text "D3" at 2719,1736 h35 r90
  text "D2" at 2989,1736 h35 r90
  text "D1" at 2719,1636 h35 r90
  text "D0" at 2989,1636 h35 r90
  text "RXD" at 2961,1526 h35
  text "PWR" at 1121,1486 h35
  text "CHANNEL A" at 1895,1450 h60
  text "TXD" at 2961,1426 h35
  text "yummycarrot" at 1230,1410 h70
  text "D1" at 1701,1351 h35
  text "D3" at 1801,1351 h35
  text "D5" at 1901,1351 h35
  text "D7" at 2001,1351 h35
  text "GND" at 2086,1351 h35
  text "C1" at 2251,1351 h35
  text "C3" at 2351,1351 h35
  text "C5" at 2451,1351 h35
  text "C7" at 2551,1351 h35
  text "GND" at 2636,1351 h35
  text "2020.3.30" at 1230,1350 h70
  text "RST" at 1221,1181 h35
  text "PWR" at 1331,1181 h35
  text "SUS" at 1441,1181 h35
  text "GND" at 1551,1181 h35
  text "EN" at 1346,1126 h35
  text "D0" at 1701,1081 h35
  text "D2" at 1801,1081 h35
  text "D4" at 1901,1081 h35
  text "D6" at 2001,1081 h35
  text "GND" at 2086,1081 h35
  text "C0" at 2251,1081 h35
  text "C2" at 2351,1081 h35
  text "C4" at 2451,1081 h35
  text "C6" at 2551,1081 h35
  text "GND" at 2636,1081 h35
  text "202014A2232V100" at 1220,1020 h70
Mechanical 1:
  lines w10: 1000,1196.85 ccw(c1196.85,1196.85) 1196.85,1000 2888.15,1000 ccw(c2888.15,1196.85) 3085,1196.85 3085,2613.15 ccw(c2888.15,2613.15) 2888.15,2810 1196.85,2810 ccw(c1196.85,2613.15) 1000,2613.15 1000,1196.85